# Altium PCB PowerUnit.PcbDoc
Units mm, origin at the board's own origin, x right, y up, seen from the top; angles counter-clockwise.
Board outline 140 x 50 mm, 2 copper layers (Top Layer, Bottom Layer); 7 components, 88 nets, 66 pads, 0 vias.
Unrouted connection lines stored in the file: 27.
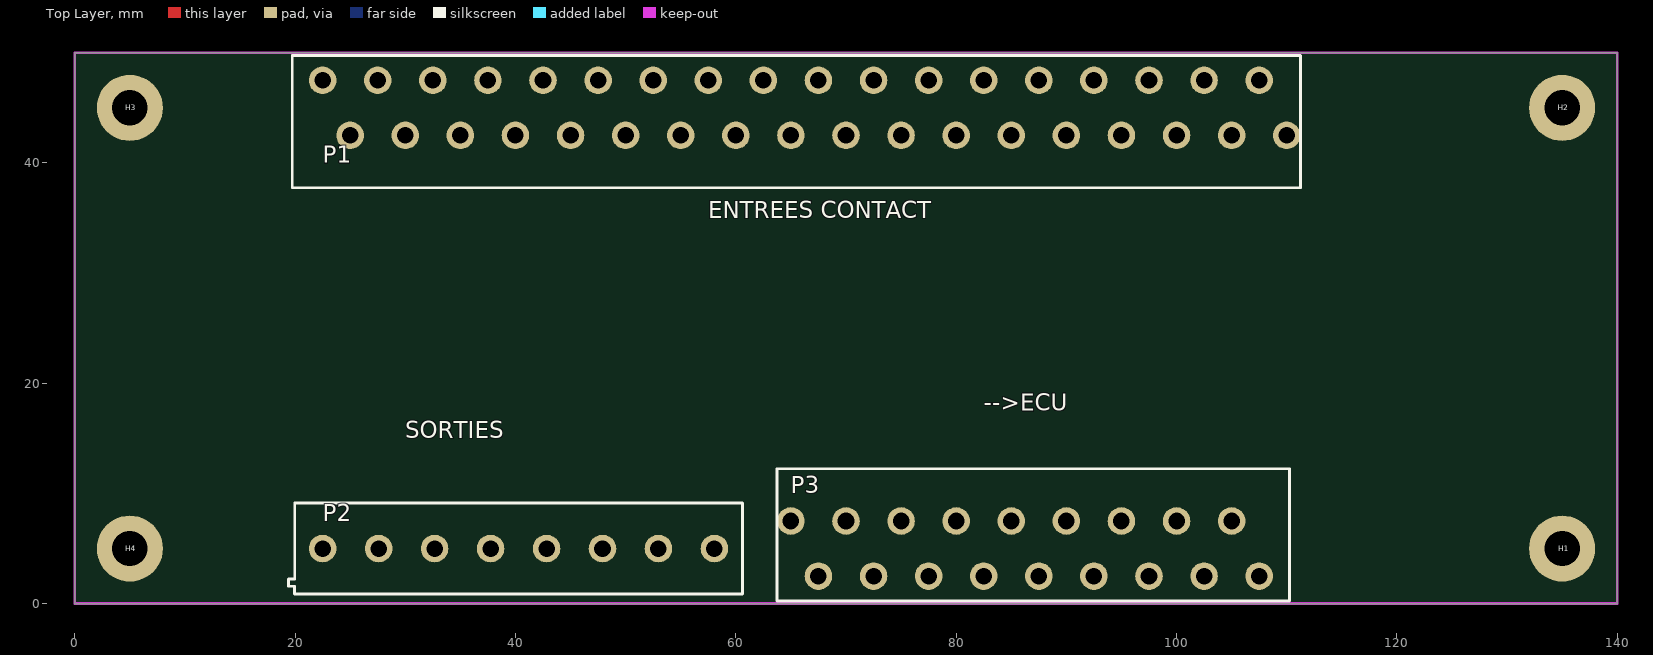
[diagram p0: Top Layer view]
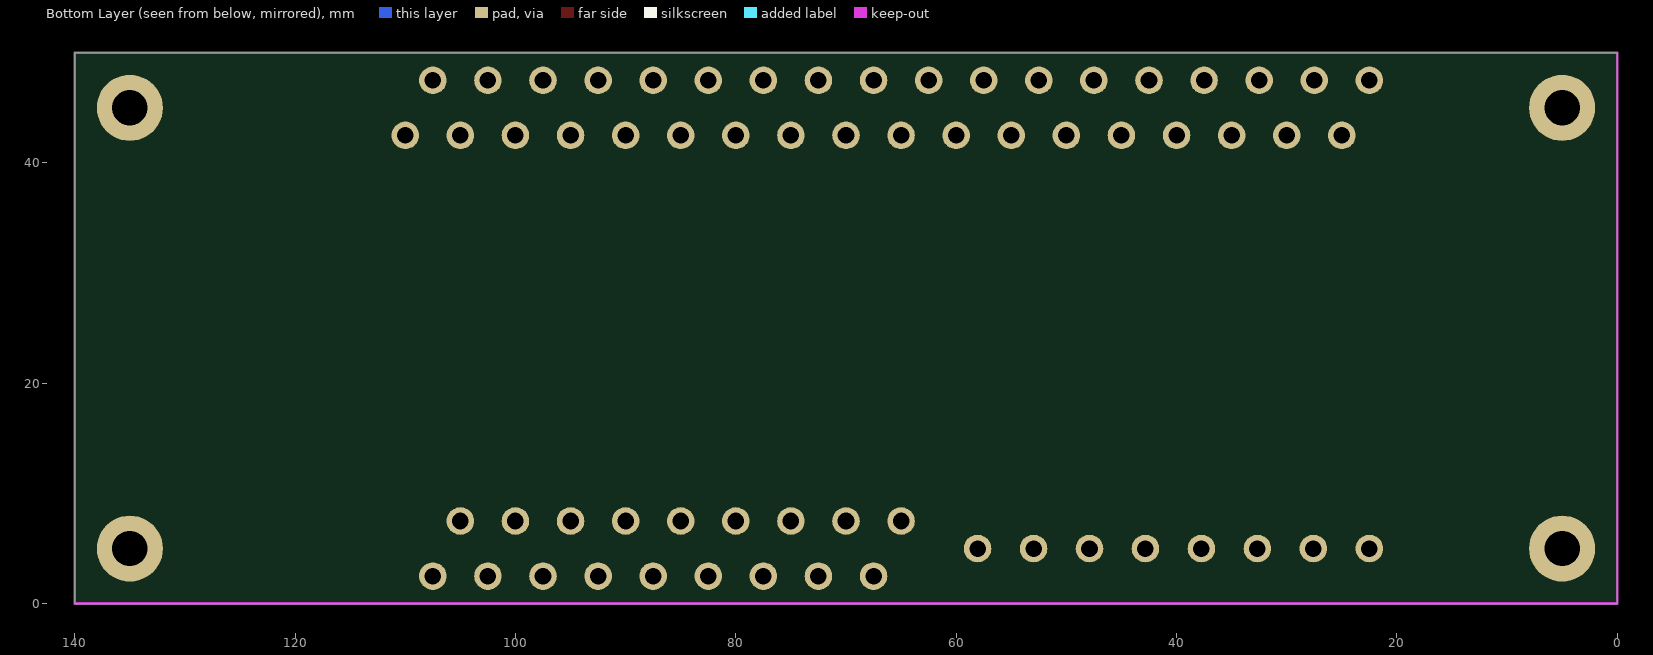
[diagram p1: Bottom Layer view, seen from below]

## Layer stack, top to bottom
Top Solder: solder mask 0.0102, Solder Resist, Dk 3.5
Top Layer: signal copper 0.0356
Dielectric 1: dielectric 0.32, FR-4, Dk 4.8
Bottom Layer: signal copper 0.0356
Bottom Solder: solder mask 0.0102, Solder Resist, Dk 3.5

## Board outline
0,0 140,0 140,50 0,50

## Design rules (kind name [scope] priority, off if disabled: settings)
Clearance [All] p1: gap=0.125
ComponentClearance [All] p1: gap=0.095 collisioncheckmode=3 verticalgap=0.095 showdistances=FALSE
FabricationTestPointUsage TestPointUsage [All] p1: valid=0 allowmultiple=FALSE
FabricationTestpoint Testpoint [All] p1: side=3 testpointundercomponent=TRUE minsize=1.016 maxsize=2.54 preferedsize=1.524 minholesize=0 maxholesize=1.016 preferedholesize=0.813 testpointgrid=0.025 allowsidetop=TRUE allowsidebottom=TRUE usegrid=TRUE gridtolerance=0
Height [All] p1: minheight=0 maxheight=30 prefheight=12.7
HoleSize [All] p1: absolutevalues=TRUE maxlimit=5 minlimit=0.15 maxpercent=80.000 minpercent=20.000
HoleToHoleClearance [All] p1: gap=0.3 allowstackedmicrovias=TRUE
MatchedLengths [All] p1: tolerance=1.5 checknetsindiffpair=TRUE checkdiffpairvsdiffpair=FALSE checkothers=FALSE
MaxMinImpedance [InNetClass('50ohm_line')] p1: minimum=40.00 maximum=60.00
MinimumSolderMaskSliver [All] p1: minsoldermaskwidth=0.01
NetAntennae [All] p1 off: netantennaetolerance=0
PlaneClearance [All] p1: clearance=0.254
PlaneConnect [All] p1: planeconnectstyle=Direct reliefexpansion=0.508 reliefentries=4 reliefconductorwidth=0.254 reliefairgap=0.254
PolygonConnect no_thermal_relief [IsNamedPolygon('NO_THERM_PLANE')] p1: connectstyle=Direct reliefconductorwidth=0.2 reliefentries=4 polygonreliefangle="90 Angle" airgapwidth=0.1
PolygonConnect [All] p2: connectstyle=Relief reliefconductorwidth=0.2 reliefentries=4 polygonreliefangle="90 Angle" airgapwidth=0.1
RoutingVias [All] p1: holewidth=0.3 width=0.7 viastyle="Through Hole" minholewidth=0.15 minwidth=0.35 maxholewidth=5 maxwidth=7
SilkToBoardRegionClearance [All] p1 off:
SilkToSilkClearance [All] p1 off: silktosilkclearance=0.254
SilkToSolderMaskClearance SilkscreenOverComponentPads [IsPad] p1 off: minsilkscreentomaskgap=0.254 clearancetoexposedcopper=TRUE
SolderMaskExpansion [All] p1: expansion=0.102
Width [All] p1: maxlimit=10 minlimit=0.1 preferedwidth=0.15
17 further rules are at their usual default settings.

## Classes and differential pairs
component class U_outputs: P2
component class U_interface: P3
component class U_Inputs: P1
component class PowerUnit: H1 H2 H3 H4

## Components (designator, comment, footprint, x,y, rotation, side; value= is the part's Value field where it differs from the comment)
H1 "M3" Mechanical_hole 135,5 r0 top
H2 "M3" Mechanical_hole 135,45 r0 top
H3 "M3" Mechanical_hole 5,45 r0 top
H4 "M3" Mechanical_hole 5,5 r0 top
P1 "Header 36" PHOENIX_PTSA05_36 22.5,47.5 r0 top
P2 "Header 8" PHOENIX_MKDSN8 22.5,5 r0 top
P3 "Header 18" PHOENIX_PTSA05_18 107.5,2.5 r180 top

## Footprints (in the part's own frame and the unit in brackets; to place one, negate y for a bottom-side part, rotate by r counter-clockwise, add the part's x,y. Pads: shape width x height; smd on the part's side, far side on the other; paste and mask are expansions set on the pad)
Mechanical_hole [mm] "board fixing hole, diameter M3"
  round 6 hole 3.2: 0(0,0)
  body extent -2.1,-2.1 2.1,2.1, height 1.7
PHOENIX_MKDSN8 [mm] "PHOENIX contacts, screw connector, pitch 5.08mm, 8 poles"
  round 2.5 hole 1.5: 1(0,0) 2(5.08,0) 3(10.16,0) 4(15.24,0) 5(20.32,0) 6(25.4,0) 7(30.48,0) 8(35.56,0)
  silkscreen extent -3.1,-4.13 38.1,4.13, body extent -3.13,-4.07 38.09,4.03, height 10
PHOENIX_PTSA05_18 [mm] "PHOENIX contacts, sPTSA0,5/ 18-2,5-Z - TERM BLOCK, PCB, 2.5MM, 18WAY"
  round 2.5 hole 1.5: 1(0,0) 2(2.5,-5) 3(5,0) 4(7.5,-5) 5(10,0) 6(12.5,-5) 7(15,0) 8(17.5,-5) 9(20,0) 10(22.5,-5) 11(25,0) 12(27.5,-5) 13(30,0) 14(32.5,-5) 15(35,0) 16(37.5,-5) 17(40,0) 18(42.5,-5)
  silkscreen extent -2.75,-9.75 43.75,2.25, body extent -2.75,-9.75 43.75,2.25, height 13.1
PHOENIX_PTSA05_36 [mm] "PHOENIX contacts, sPTSA0,5/ 36  TERM BLOCK, PCB, 2.5MM, 36WAY"
  round 2.5 hole 1.5: 1(0,0) 2(2.5,-5) 3(5,0) 4(7.5,-5) 5(10,0) 6(12.5,-5) 7(15,0) 8(17.5,-5) 9(20,0) 10(22.5,-5) 11(25,0) 12(27.5,-5) 13(30,0) 14(32.5,-5) 15(35,0) 16(37.5,-5) 17(40,0) 18(42.5,-5) 19(45,0) 20(47.5,-5) 21(50,0) 22(52.5,-5) 23(55,0) 24(57.5,-5) 25(60,0) 26(62.5,-5) 27(65,0) 28(67.5,-5) 29(70,0) 30(72.5,-5) 31(75,0) 32(77.5,-5) 33(80,0) 34(82.5,-5) 35(85,0) 36(87.5,-5)
  silkscreen extent -2.75,-9.75 88.75,2.25, body extent -2.75,-9.75 88.75,2.25, height 13.11

## Part data
H1 H2 H3 H4: library part trous_de_fixation
P1: "Header, 36-Pin"
P2: "Header, 8-Pin"
P3: "Header, 10-Pin"

## Nets (pads, with @x,y where several pads share a name; then routed paths per layer and width w, separated by ;. In a path a pad name is that pad's centre, name@x,y a point inside that pad or via, vN(x,y) a via of type N, cw(c..) or ccw(c..) an arc to the next point about the centre after c; other vN are vias at no path point)
3V3: P1.36
5VNTC: 
10V: P1.34
BRIDGEPOL: 
DI_0: P3.4
DI_1: P3.5
DI_2: P3.6
DI_3: P3.7
DI_4: P3.8
DI_5: P3.9
DI_6: P3.10
DI_7: P3.11
DI_8: P3.12
DI_9: P3.13
EMBRAY: P1.19
GAS: P1.16
GND: H1.0 H2.0 H3.0 H4.0 P1.2 P1.5 P1.8 P1.11 P1.14 P1.17 P1.20 P1.23 P1.26 P1.29 P1.32 P2.8 P3.1
HUILE: P1.22
MOT+: 
MOT-: 
NetC1_1: 
NetC8_2: 
NetC9_2: 
NetC10_2: 
NetC11_2: 
NetC13_2: 
NetC14_2: 
NetC15_2: 
NetC16_2: 
NetC17_2: 
NetC18_2: 
NetC21_1: 
NetC23_1: 
NetC23_2: P2.2
NetC26_1: 
NetC26_2: P2.3
NetC28_2: 
NetC29_2: 
NetD2_2: 
NetD3_2: 
NetD4_2: 
NetD5_2: 
NetD8_2: 
NetD9_2: 
NetD10_2: 
NetD11_2: 
NetD14_2: 
NetD15_2: 
NetD21_1: P2.4
NetD21_2: 
NetD22_1: P2.6
NetD22_2: 
NetP2_5: P2.5
NetP2_7: P2.7
NetP3_14: P3.14
NetP3_15: P3.15
NetP3_16: P3.16
NetP3_17: P3.17
NetR16_1: 
NetR16_2: 
NetR17_1: 
NetR17_2: 
NetR18_2: 
NetR19_1: 
NetR19_2: 
NetR20_1: 
NetR20_2: 
NetR21_2: 
NetR22_1: 
NetR26_1: 
NetR28_1: 
NetU7_7: 
NetU8_1: 
NEUTRE: P1.13
NTC: P1.31
OVERTEMP: 
P1: P1.1
P2: P1.4
RAPPORT+: P1.7
RAPPORT-: P1.10
REGIME: P1.25
RELAYOUT1: 
RELAYOUT2: 
RES: P1.28
VBAT: P2.1
VIF: P1.35
VIN: P1.3 P1.6 P1.9 P1.12 P1.15 P1.18 P1.21 P1.24 P1.27 P1.30 P1.33 P3.2
VNTC: P3.3
pads on no net: P3.18

## Keep-outs
Keep-Out Layer:
  the board outline again, w0.254

## Silkscreen, mask and mechanical layers (free items; w line width, h text height)
Top Overlay:
  text "ENTREES CONTACT" at 57.5,35 h1.52
  text "-->ECU" at 82.5,17.5 h1.52
  text "SORTIES" at 30,15 h1.52
Mechanical 15:
  the board outline again, w0.254

## Dimensions
0,0 to 140,0 on Mechanical 15
140,0 to 140,50 on Mechanical 15